# Altium PCB PCB1.PcbDoc
Units mil, origin at the board's own origin, x right, y up, seen from the top; angles counter-clockwise.
Board outline 3646.24 x 274.5 mil, 2 copper layers (Top Layer, Bottom Layer), stack 10.984 mil thick; 2 components, 10 nets, 20 pads, 0 vias.
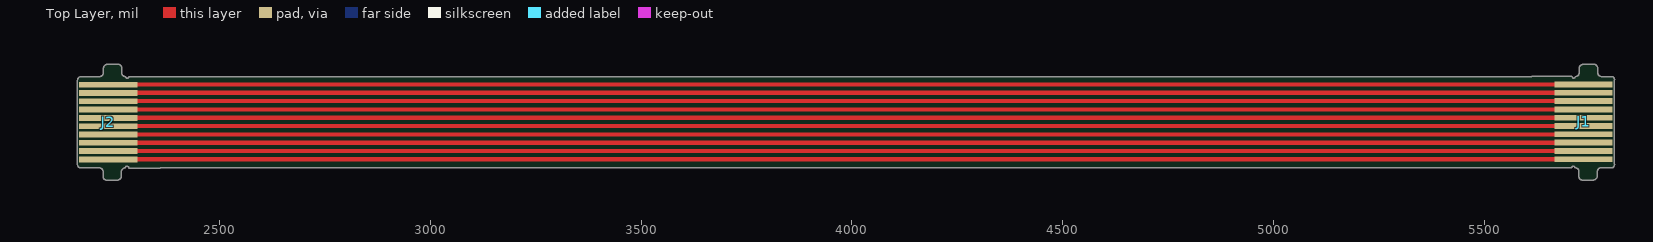
[diagram p0: Top Layer view]
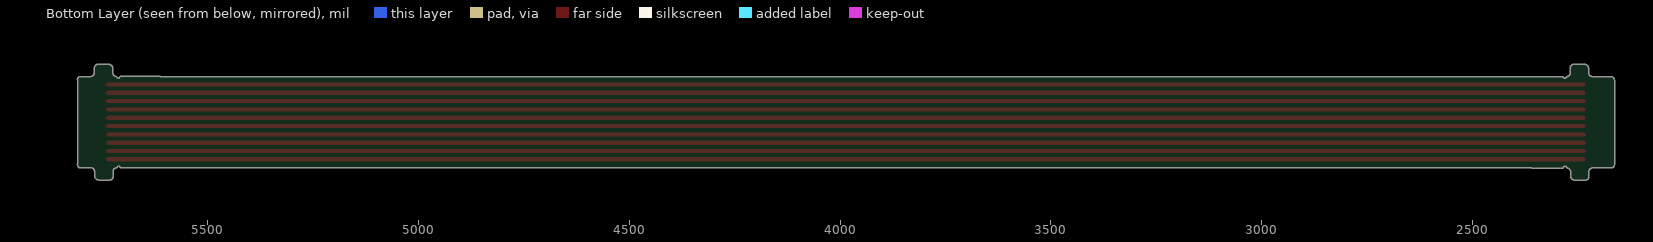
[diagram p1: Bottom Layer view, seen from below]

## Layer stack, top to bottom
Top Stiffener: core 3.937, Core-009, Dk 4.5
Top PI Coverlay: solder mask 0.4921, FC-001, Dk 4
Adhesive 3: prepreg 0.5906, PP-006, Dk 4.1
Top Layer: signal copper 0.4724
Polyimide: core 0.9843, Core-009, Dk 4.5
Bottom Layer: signal copper 0.4724
Adhesive 1: prepreg 0.5906, PP-006, Dk 4.1
Bottom PI Coverlay: solder mask 0.4921, FC-001, Dk 4
Bottom Stifener: core 3.937, Core-009, Dk 4.5

## Board outline
5774.86,4129.47 cw(c5775.57,4122.01) 5775.7,4129.5 5803.43,4129.5 ccw(c5801.47,4137.03) 5809,4139 5809,4337 ccw(c5801.87,4338.86) 5803.73,4346 5800.02,4346 ccw(c5800.01,4343.75) 5800,4346 5779,4346 cw(c5779,4355.5) 5769.5,4355.5 5769.5,4365.5 ccw(c5760,4365.5) 5767.29,4371.59 ccw(c5760.94,4367.39) 5760.94,4375 5735.06,4375 ccw(c5735.06,4365.5) 5725.55,4365.5 5725.55,4355.5 cw(c5716.06,4355.5) 5716.06,4346 cw(c5712.36,4346) 5712.36,4342.31 5711.75,4342.31 cw(c5711.7,4345.98) 5711.45,4342.31 cw(c5713,4346) 5709,4346 5709,4346.03 5708.02,4346.04 cw(c5711.72,4345.98) 5708.06,4346.5 5612.86,4346.5 5612.86,4346.03 2285,4346 cw(c2281.3,4346) 2281.3,4342.31 2280.7,4342.31 cw(c2280.7,4346) 2277,4345.99 cw(c2277,4355.5) 2267.61,4354.09 cw(c2276.17,4354.57) 2267.59,4354.57 2267.59,4367.3 ccw(c2259.89,4367.3) 2259.89,4375 2258,4375 2234,4375 ccw(c2234,4365.5) 2224.5,4365.5 2224.5,4355.44 cw(c2215,4355.5) 2215,4346 2172,4346 ccw(c2172,4337) 2163,4337 2163,4137.11 ccw(c2170.61,4137.11) 2170.61,4129.5 2214.56,4129.5 cw(c2214.5,4120) 2224,4120 2224,4108.11 ccw(c2231.61,4108.11) 2231.61,4100.5 2257.5,4100.5 ccw(c2257.5,4110) 2267,4110 2267,4120 cw(c2276.5,4120) 2276.5,4129.5 cw(c2280.2,4129.5) 2280.2,4133.19 2280.8,4133.19 cw(c2280.86,4129.52) 2284.05,4131.35 cw(c2280.5,4129.5) 2284.5,4129.5 2284.54,4129.5 cw(c2280.89,4129.51) 2284.5,4129 2359,4129 2359,4129.51 5612.86,4129.98 5612.86,4129.5 5707.56,4129.5 cw(c5711.28,4129.49) 5707.59,4130 5708,4130 cw(c5712,4130) 5708.55,4132.02 cw(c5711.25,4129.5) 5711.25,4133.19 5711.86,4133.19 cw(c5711.86,4129.5) 5715.55,4129.5 5716.39,4129.5 cw(c5716.39,4120.93) 5724.96,4120.93 5724.96,4108.2 ccw(c5732.66,4108.2) 5732.67,4100.5 5758.56,4100.5 ccw(c5758.56,4110) 5765.87,4103.94 ccw(c5759,4110.5) 5768.5,4110.5 5768.5,4120.5 cw(c5778,4120.5)
board region "Layer Stack Region 3": 5809,4139 5809.39,4137.5 5808.97,4134.43 5807.4,4131.76 5804.93,4129.89 5803.43,4129.5 5775.7,4129.5 5774.18,4129.37 5771.36,4128.21 5769.24,4126.04 5768.15,4123.2 5768.06,4121.67 5768.06,4110 5768.06,4108.11 5766.61,4104.62 5763.94,4101.95 5760.44,4100.5 5758.56,4100.5 5732.67,4100.5 5731.13,4100.5 5728.3,4101.67 5726.14,4103.84 5724.96,4106.67 5724.96,4108.2 5724.96,4120.93 5724.8,4122.6 5723.52,4125.69 5721.15,4128.06 5718.06,4129.34 5716.39,4129.5 5715.56,4129.5 5715.48,4130.22 5714.93,4131.55 5713.91,4132.57 5712.58,4133.12 5711.86,4133.19 5711.86,4133.2 5711.25,4133.2 5710.53,4133.12 5709.2,4132.57 5708.18,4131.55 5707.63,4130.22 5707.56,4129.5 5612.86,4129.5 5612.86,4346.5 5708.06,4346.5 5708.03,4345.71 5708.48,4344.2 5709.52,4343.02 5710.96,4342.38 5711.75,4342.3 5712.36,4342.3 5713.08,4342.38 5714.41,4342.93 5715.43,4343.95 5715.98,4345.28 5716.06,4346 5717.91,4346.18 5721.33,4347.6 5723.95,4350.22 5725.37,4353.65 5725.56,4355.5 5725.56,4365.5 5725.56,4367.39 5727,4370.88 5729.67,4373.55 5733.17,4375 5735.06,4375 5760.94,4375 5762.46,4375 5765.26,4373.84 5767.4,4371.7 5768.56,4368.9 5768.56,4367.39 5768.56,4352.68 5768.67,4351.35 5769.68,4348.89 5771.58,4347.03 5774.06,4346.08 5775.39,4346 5803.73,4346 5805.15,4345.63 5807.49,4343.86 5808.97,4341.33 5809.37,4338.42 5809,4337
board region "Layer Stack Region 2": 2284.5,4129 2359,4129 2359,4346 2285,4346 2284.93,4345.28 2284.38,4343.95 2283.36,4342.93 2282.03,4342.38 2281.3,4342.3 2280.7,4342.3 2279.97,4342.38 2278.64,4342.93 2277.62,4343.95 2277.07,4345.28 2277,4346 2276.16,4346 2274.49,4346.16 2271.4,4347.44 2269.04,4349.81 2267.76,4352.9 2267.59,4354.57 2267.59,4367.3 2267.59,4368.83 2266.42,4371.66 2264.25,4373.83 2261.42,4375 2259.89,4375 2234,4375 2232.11,4375 2228.62,4373.55 2225.95,4370.88 2224.5,4367.39 2224.5,4365.5 2224.5,4353.83 2224.41,4352.3 2223.32,4349.46 2221.19,4347.29 2218.38,4346.13 2216.85,4346 2172,4346 2170.21,4346 2166.9,4344.63 2164.37,4342.1 2163,4338.79 2163,4337 2163,4137.11 2163,4135.6 2164.16,4132.8 2166.3,4130.66 2169.1,4129.5 2170.61,4129.5 2216.17,4129.5 2217.7,4129.41 2220.54,4128.32 2222.71,4126.19 2223.87,4123.38 2224,4121.85 2224,4108.11 2224,4106.6 2225.16,4103.8 2227.3,4101.66 2230.1,4100.5 2231.61,4100.5 2257.5,4100.5 2259.39,4100.5 2262.88,4101.95 2265.55,4104.62 2267,4108.11 2267,4110 2267,4120 2267.18,4121.85 2268.6,4125.28 2271.22,4127.9 2274.65,4129.32 2276.5,4129.5 2276.57,4130.22 2277.12,4131.55 2278.14,4132.57 2279.47,4133.12 2280.2,4133.2 2280.8,4133.2 2281.59,4133.12 2283.03,4132.48 2284.07,4131.3 2284.53,4129.79
board region "Layer Stack Region 1": 2285,4346 2359,4346 2359,4129.51 5612.86,4129.99 5612.86,4346.03
board region "Layer Stack Region 1": 2267.6,4354.09 2267.7,4352.45 2269.08,4349.47 2271.47,4347.22 2274.52,4346 2276.16,4346 2277,4346 2275.32,4346.15 2272.17,4347.32 2269.62,4349.51 2268,4352.45
board region "Layer Stack Region 1": 2216.85,4346 2218.41,4345.97 2221.28,4347.16 2223.45,4349.38 2224.56,4352.28 2224.5,4353.83 2224.5,4355.44 2224.31,4353.6 2222.88,4350.19 2220.26,4347.59 2216.85,4346.18 2215,4346 2172,4346
board region "Layer Stack Region 1": 5775.13,4345.99 5775.16,4345.99 5775.23,4346 5775.29,4346 5775.36,4346 5775.39,4346 5800.02,4346 5800.01,4346 5800,4346 5779,4346 5777.15,4346.18 5773.72,4347.6 5771.1,4350.22 5769.68,4353.65 5769.5,4355.5 5769.5,4365.5 5769.5,4366.33 5769.21,4367.96 5768.65,4369.52 5767.82,4370.95 5767.29,4371.59 5767.58,4371.12 5768.05,4370.11 5768.37,4369.05 5768.53,4367.95 5768.56,4367.39 5768.56,4352.68 5768.53,4351.36 5769.51,4348.9 5771.37,4347.02 5773.8,4345.99
board region "Layer Stack Region 1": 5708.02,4345.98 5708.02,4345.28 5708.53,4343.98 5709.49,4342.96 5710.75,4342.36 5711.45,4342.31 5710.93,4342.58 5710.03,4343.32 5709.38,4344.3 5709.04,4345.42 5709,4346 5709,4346.03 5708.02,4346.03 5708.02,4346.02 5708.02,4346 5708.02,4345.99
board region "Layer Stack Region 1": 2214.56,4129.5 2216.41,4129.31 2219.81,4127.88 2222.41,4125.26 2223.82,4121.85 2224,4120 2224,4121.85 2224.03,4123.41 2222.84,4126.28 2220.62,4128.45 2217.72,4129.56 2216.17,4129.5
board region "Layer Stack Region 1": 2284.05,4131.35 2284.15,4131.13 2284.32,4130.68 2284.44,4130.22 2284.49,4129.74 2284.5,4129.5 2284.54,4129.5 2284.54,4129.74 2284.48,4130.22 2284.35,4130.69 2284.17,4131.14
board region "Layer Stack Region 1": 5707.59,4130 5708,4130 5708.01,4130.26 5708.08,4130.79 5708.22,4131.3 5708.42,4131.79 5708.55,4132.02 5708.35,4131.81 5708.03,4131.34 5707.79,4130.83 5707.63,4130.28
board region "Layer Stack Region 1": 5765.87,4103.94 5766.5,4104.6 5767.48,4106.12 5768.16,4107.81 5768.5,4109.59 5768.5,4110.5 5768.5,4120.5 5768.61,4121.96 5769.5,4124.74 5771.19,4127.12 5773.52,4128.88 5774.86,4129.47 5773.43,4129.33 5770.86,4128.01 5768.96,4125.84 5768,4123.11 5768.06,4121.67 5768.06,4110 5768.02,4109.18 5767.74,4107.56 5767.18,4106.02 5766.37,4104.59

## Design rules (kind name [scope] priority, off if disabled: settings)
Clearance [All] p1: gap=4 ignorepadtopadclearanceinfootprint=FALSE
DiffPairsRouting [All] p1: maxlimit=10 minlimit=10 mostfreqgap=10 toplayer_minwidth=15 toplayer_maxwidth=15 toplayer_prefwidth=15 bottomlayer_minwidth=15 bottomlayer_maxwidth=15 bottomlayer_prefwidth=15 substack1={58336BC1-67EB-41DA-A385-05B3C3ADA012} toplayer_{58336bc1-67eb-41da-a385-05b3c3ada012}_minwidth=15 toplayer_{58336bc1-67eb-41da-a385-05b3c3ada012}_maxwidth=15 toplayer_{58336bc1-67eb-41da-a385-05b3c3ada012}_prefwidth=15 bottomlayer_{58336bc1-67eb-41da-a385-05b3c3ada012}_minwidth=15 bottomlayer_{58336bc1-67eb-41da-a385-05b3c3ada012}_maxwidth=15 bottomlayer_{58336bc1-67eb-41da-a385-05b3c3ada012}_prefwidth=15 substack2={8291BD77-FF0C-409E-89F4-BDBD41A24079} toplayer_{8291bd77-ff0c-409e-89f4-bdbd41a24079}_minwidth=15 toplayer_{8291bd77-ff0c-409e-89f4-bdbd41a24079}_maxwidth=15 toplayer_{8291bd77-ff0c-409e-89f4-bdbd41a24079}_prefwidth=15 bottomlayer_{8291bd77-ff0c-409e-89f4-bdbd41a24079}_minwidth=15 bottomlayer_{8291bd77-ff0c-409e-89f4-bdbd41a24079}_maxwidth=15 bottomlayer_{8291bd77-ff0c-409e-89f4-bdbd41a24079}_prefwidth=15 substack3={18D83FAC-5AFC-443E-ABD3-E98259FA31C7} toplayer_{18d83fac-5afc-443e-abd3-e98259fa31c7}_minwidth=15 toplayer_{18d83fac-5afc-443e-abd3-e98259fa31c7}_maxwidth=15 toplayer_{18d83fac-5afc-443e-abd3-e98259fa31c7}_prefwidth=15 bottomlayer_{18d83fac-5afc-443e-abd3-e98259fa31c7}_minwidth=15 bottomlayer_{18d83fac-5afc-443e-abd3-e98259fa31c7}_maxwidth=15 bottomlayer_{18d83fac-5afc-443e-abd3-e98259fa31c7}_prefwidth=15 maxuncoupledlength=500
PolygonConnect [All] p1: connectstyle=Relief reliefconductorwidth=10 reliefentries=4 polygonreliefangle="90 Angle" airgapwidth=10
RoutingVias [All] p1: holewidth=28 width=50 viastyle="Through Hole" minholewidth=28 minwidth=50 maxholewidth=28 maxwidth=50
SolderMaskExpansion [All] p1: expansion=4 istentingtop=FALSE
SupplyNets "Schematic Supply Nets_1" [InNet('VCC')] p1: voltage=0.000
SupplyNets "Schematic Supply Nets" [InNet('GND')] p2: voltage=0.000
Width [All] p1: maxlimit=10 minlimit=10 preferedwidth=10 substack1={58336BC1-67EB-41DA-A385-05B3C3ADA012} substack2={8291BD77-FF0C-409E-89F4-BDBD41A24079} substack3={18D83FAC-5AFC-443E-ABD3-E98259FA31C7}
29 further rules are at their usual default settings.

## Components (designator, comment, footprint, x,y, rotation, side; value= is the part's Value field where it differs from the comment)
J1 "10FHH-SM1-GAN-TF FPC" PCBComponent_1 5805,4150 r90 top
J2 "10FHH-SM1-GAN-TF FPC" PCBComponent_1 2304.9,4149.52 r90 top

## Footprints (in the part's own frame and the unit in brackets; to place one, negate y for a bottom-side part, rotate by r counter-clockwise, add the part's x,y. Pads: shape width x height; smd on the part's side, far side on the other; paste and mask are expansions set on the pad)
PCBComponent_1 [mm]
  rect 0.35x3.5 smd: 1(0,1.75) 2(0.5,1.75) 3(1,1.75) 4(1.5,1.75) 5(2,1.75) 6(2.5,1.75) 7(3,1.75) 8(3.5,1.75) 9(4,1.75) 10(4.5,1.75)

## Nets (pads, with @x,y where several pads share a name; then routed paths per layer and width w, separated by ;. In a path a pad name is that pad's centre, name@x,y a point inside that pad or via, vN(x,y) a via of type N, cw(c..) or ccw(c..) an arc to the next point about the centre after c; other vN are vias at no path point)
GND: J1.10 J2.10 | length 3499.6
  Top Layer w10: J2.10@2236.48,4327.17 2359,4327.17 5612.86,4327.17 J1.10
Pad1: J1.1 J2.1 | length 3499.6
  Top Layer w10: J2.1@2236.48,4150 2267.66,4150 2359,4150 5612.86,4150 5708.03,4150 5727.02,4150 J1.1
Pad2: J1.2 J2.2 | length 3499.6
  Top Layer w10: J2.2 2254.26,4169.2 2267.66,4169.2 2359,4169.2 5612.86,4169.2 5708.03,4169.2 5720.52,4169.2 J1.2@5735.62,4169.2
Pad3: J1.3 J2.3 | length 3499.6
  Top Layer w10: J2.3 2359,4188.89 5612.86,4188.89 J1.3@5735.62,4188.89
Pad4: J1.4 J2.4 | length 3499.6
  Top Layer w10: J2.4 2359,4208.57 5612.86,4208.57 J1.4@5735.62,4208.57
Pad5: J1.5 J2.5 | length 3499.6
  Top Layer w10: J2.5@2236.48,4228.74 2359,4228.74 5612.86,4228.74 J1.5
Pad6: J1.6 J2.6 | length 3499.6
  Top Layer w10: J2.6@2236.48,4248.43 2359,4248.43 5612.86,4248.43 J1.6
Pad7: J1.7 J2.7 | length 3499.6
  Top Layer w10: J2.7@2236.48,4268.11 2359,4268.11 5612.86,4268.11 J1.7
Pad8: J1.8 J2.8 | length 3499.6
  Top Layer w10: J2.8@2236.48,4287.8 2359,4287.8 5612.86,4287.8 J1.8
VCC: J1.9 J2.9 | length 3499.6
  Top Layer w10: J2.9@2236.48,4307.48 2359,4307.48 5612.86,4307.48 J1.9

## Silkscreen, mask and mechanical layers (free items; w line width, h text height)
Mechanical 1:
  lines w1: 2340.79,4129.5 2284.5,4129.5 ccw(c2280.5,4129.5) 2276.5,4129.5 ccw(c2276.5,4120) 2267,4120 2267,4110 cw(c2257.5,4110) 2257.5,4100.5 2233.5,4100.5 cw(c2233.5,4110) 2224,4110 2224,4120 ccw(c2214.5,4120) 2214.5,4129.5 2172.5,4129.5 cw(c2172.5,4139) 2163,4139 2163,4337 cw(c2172,4337) 2172,4346 2215,4346 ccw(c2215,4355.5) 2224.5,4355.5 2224.5,4365.5 cw(c2234,4365.5) 2234,4375 2258,4375 cw(c2258,4365.5) 2267.5,4365.5 2267.5,4355.5 ccw(c2277,4355.5) 2277,4346 ccw(c2281,4346) 2285,4346 2342,4346 5709,4346.04 ; 2342,4129.51 5708,4130 cw(c5712,4130) 5716,4130 cw(c5716,4120.5) 5725.5,4120.5 5725.5,4110.5 ccw(c5735,4110.5) 5735,4101 5759,4101 ccw(c5759,4110.5) 5768.5,4110.5 5768.5,4120.5 cw(c5778,4120.5) 5778,4130 ccw(c5779.21,4131.21) 5779.21,4129.5 5799.5,4129.5 ccw(c5799.5,4139) 5809,4139 5809,4337 ccw(c5800,4337) 5800,4346 5779,4346 cw(c5779,4355.5) 5769.5,4355.5 5769.5,4365.5 ccw(c5760,4365.5) 5760,4375 5736,4375 ccw(c5736,4365.5) 5726.5,4365.5 5726.5,4355.5 cw(c5717,4355.5) 5717,4346 cw(c5713,4346) 5709,4346
BotStiffener:
  lines w1: 2224.5,4353.83 ccw(c2224.5,4353.83) 2224.5,4353.83 ; 2224.5,4353.83 cw(c2216.67,4353.83) 2216.67,4346 2171.1,4346 ccw(c2171.1,4337.9) 2163,4337.9 2163,4137.11 ccw(c2170.61,4137.11) 2170.61,4129.5 2216.21,4129.5 cw(c2216.21,4129.31) 2216.41,4129.31 cw(c2216.41,4121.71) 2224,4121.71 2224,4108.11 ccw(c2231.61,4108.11) 2231.61,4100.5 2257.5,4100.5 ccw(c2257.5,4110) 2267,4110 2267,4120 cw(c2276.5,4120) 2276.5,4129.5 cw(c2280.2,4129.5) 2280.2,4133.2 2280.71,4133.2 cw(c2280.71,4129.4) 2284.51,4129.4 cw(c2284.63,4129.4) 2284.63,4129.51 2359,4129.51 2359,4346 2285,4346 cw(c2281.3,4346) 2281.3,4342.3 2280.7,4342.3 cw(c2280.7,4346) 2277,4346 2276.16,4346 cw(c2276.16,4354.57) 2267.59,4354.57 2267.59,4368.06 ; 2224.5,4353.83 2224.5,4367.39 cw(c2232.11,4367.39) 2232.11,4375 ; 2232.11,4375 ccw(c2232.11,4375) 2232.11,4375 ; 2232.11,4375 2260.66,4375 cw(c2260.66,4368.06) 2267.59,4368.06 ; 2232.11,4375 2232.11,4375 ; 2267.59,4368.06 ccw(c2267.59,4368.06) 2267.59,4368.06 ; 5613.58,4129.57 5613.58,4346.57 5708.78,4346.57 ccw(c5712.42,4346.06) 5712.47,4342.38 5713.08,4342.38 ccw(c5713.08,4346.07) 5716.78,4346.07 ccw(c5716.78,4355.57) 5726.28,4355.57 5726.28,4365.57 cw(c5735.78,4365.57) 5735.78,4375.07 5761.67,4375.07 cw(c5761.67,4367.46) 5769.28,4367.46 5769.28,4352.75 ccw(c5775.85,4352.64) 5776.11,4346.07 5804.45,4346.07 cw(c5802.59,4338.94) 5809.72,4337.07 5809.72,4139.07 cw(c5802.19,4137.1) 5804.16,4129.57 5776.42,4129.57 ccw(c5776.29,4122.05) 5768.78,4121.74 5768.78,4110.07 cw(c5759.28,4110.07) 5759.28,4100.57 5733.39,4100.57 cw(c5733.39,4108.27) 5725.68,4108.27 5725.68,4121 ccw(c5717.11,4121) 5717.11,4129.57 5716.28,4129.57 ccw(c5712.58,4129.57) 5712.58,4133.27 5711.97,4133.27 ccw(c5711.97,4129.57) 5708.28,4129.57 5613.58,4129.57
  text "PI Stiffener with gold fingers / Gold Fingers: 0.3mm / Polyimide Thickness: 0.25mm / Stiffener location: Refer to BotStiffener mechanical layer" at 2094,3445 h60